# Altium PCB ADSTM32-PCB.PcbDoc
Units mm, origin at the board's own origin, x right, y up, seen from the top; angles counter-clockwise.
Board outline 49.53 x 28 mm, 2 copper layers (Top Layer, Bottom Layer), stack 1.67 mm thick; 30 components, 26 nets, 139 pads, 69 vias.
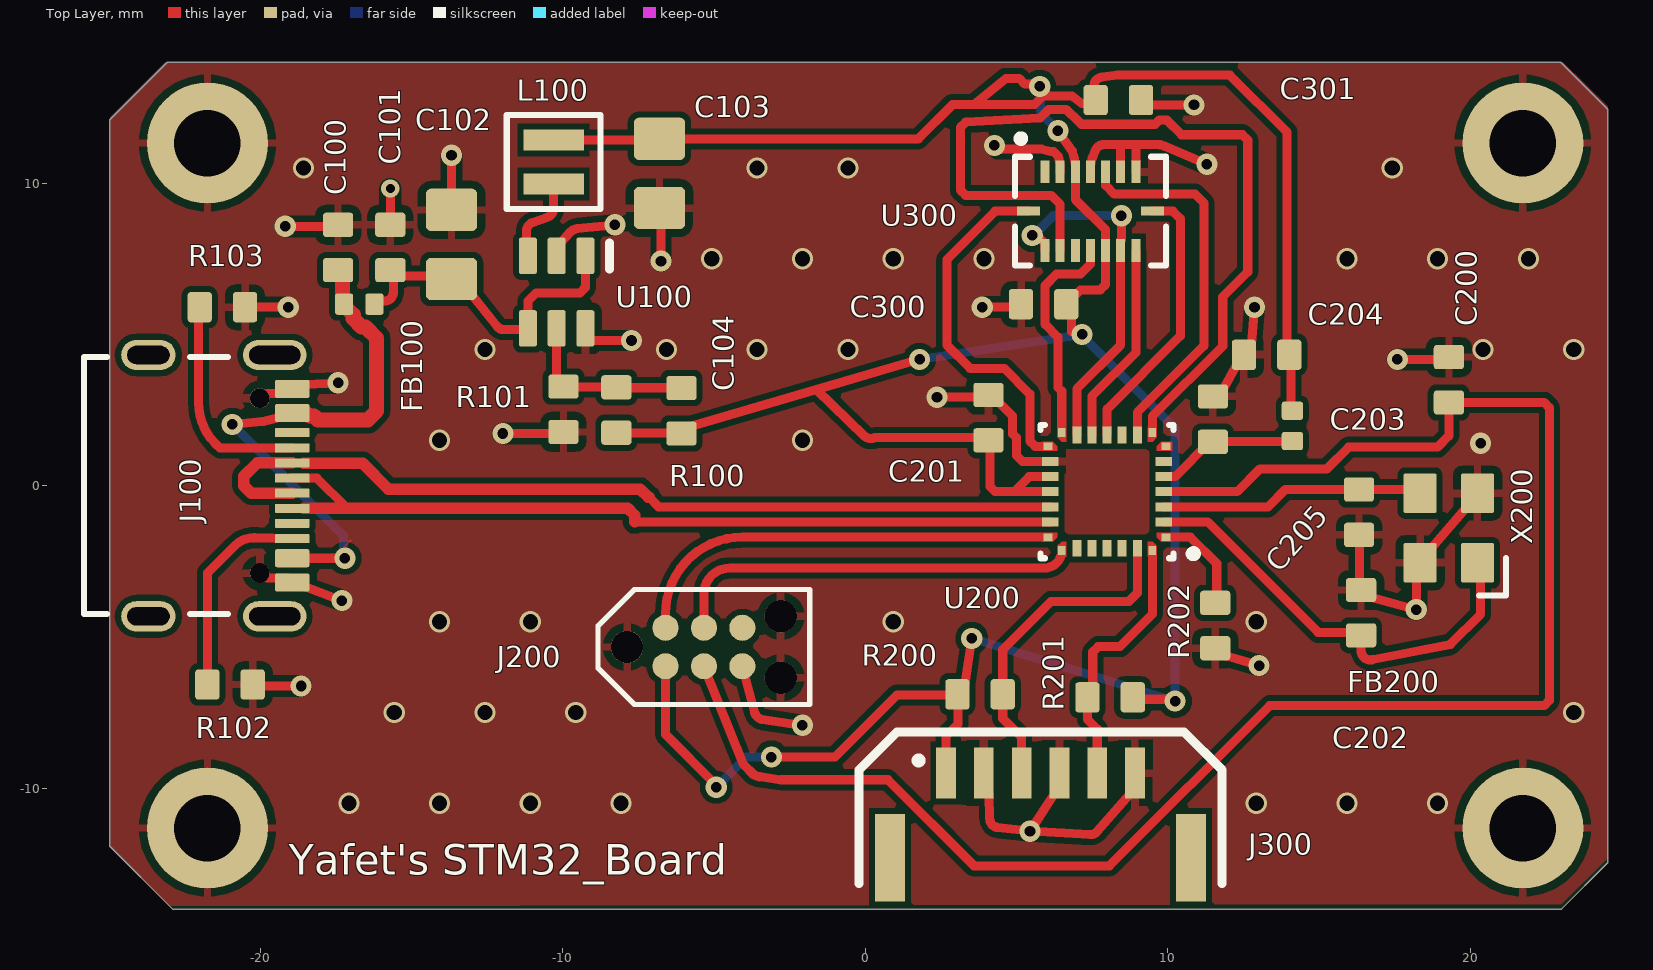
[diagram p0: Top Layer view]
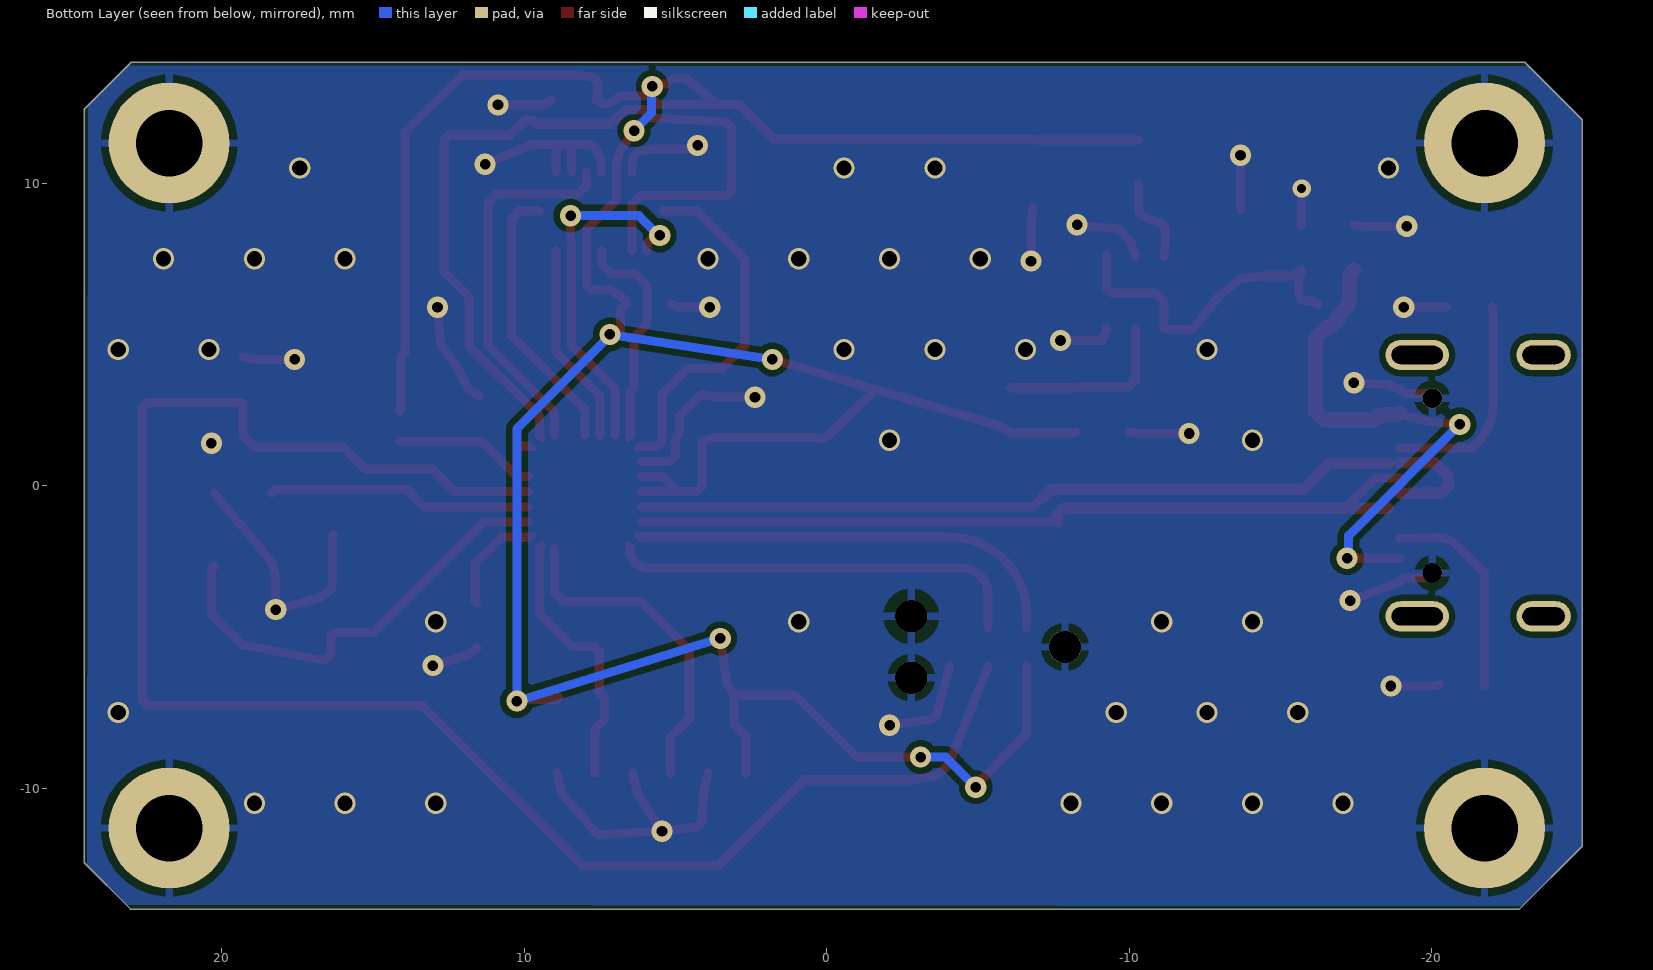
[diagram p1: Bottom Layer view, seen from below]
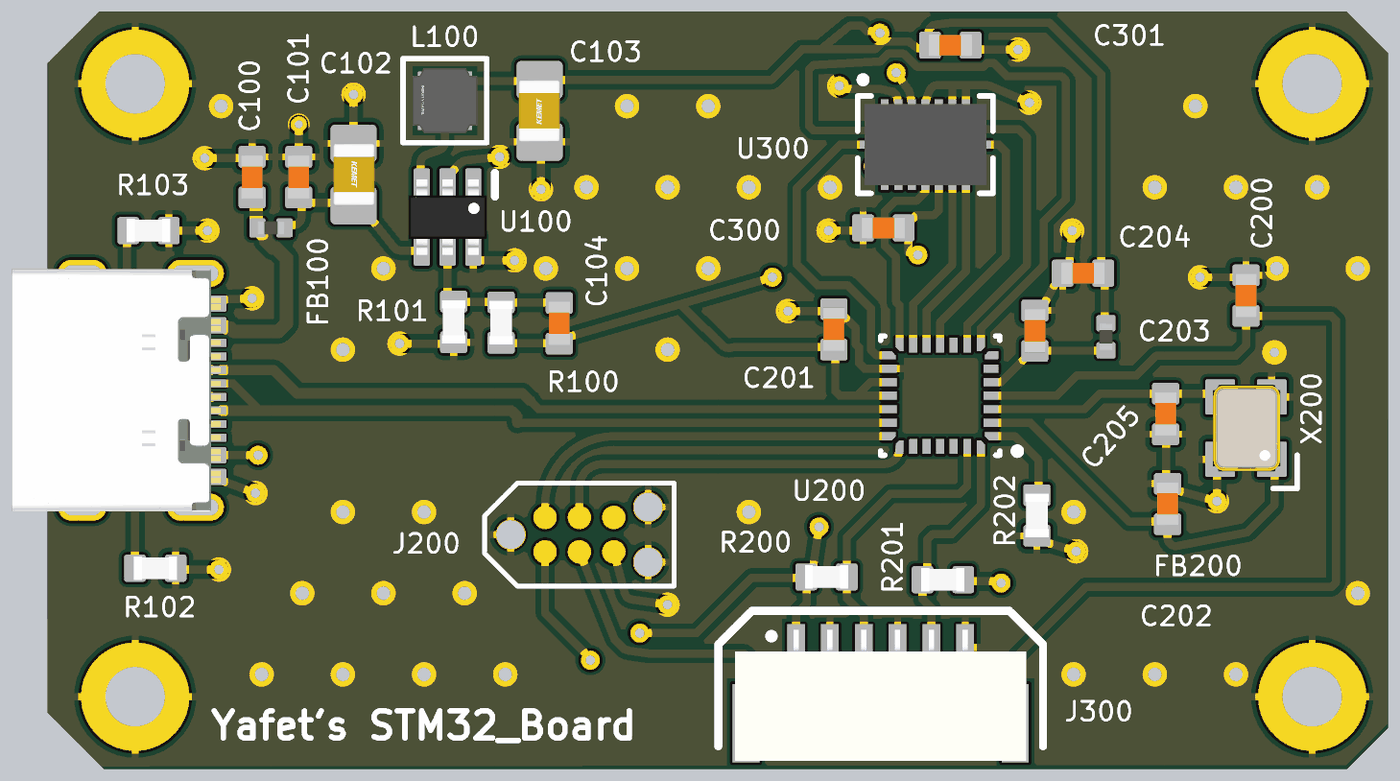
[diagram p2: 3D render of the assembled board from above, using the file's embedded part models]

## Layer stack, top to bottom
Top Solder: solder mask 0.0254, SM-001, Dk 3.5
Top Layer: signal copper 0.035
Dielectric 1: core 1.6, Core-043, Dk 4.6
Bottom Layer: signal copper 0.035
Bottom Solder: solder mask 0.0254, SM-001, Dk 3.5

## Board outline
-22.9,-14 -24.975,-11.925 -24.975,12.1 -23.075,14 23,14 24.555,12.445 24.555,-12.47 23.025,-14 22.357,-14

## Design rules (kind name [scope] priority, off if disabled: settings)
Clearance [All] p1: gap=0.2 ignorepadtopadclearanceinfootprint=FALSE except(0: Arc-Hole Track-Hole SMDPad-Hole THPad-Hole Via-Hole Fill-Hole Poly-Hole Region-Hole Text-Hole; 0.15: Arc-Arc Arc-Track Arc-SMDPad Track-Track Track-SMDPad SMDPad-SMDPad; 0.3: Arc-THPad Track-THPad SMDPad-THPad THPad-THPad)
DiffPairsRouting [All] p1: maxlimit=0.35 minlimit=0.15 mostfreqgap=0.254 toplayer_minwidth=0.3 toplayer_maxwidth=0.5 toplayer_prefwidth=0.381 bottomlayer_minwidth=0.3 bottomlayer_maxwidth=0.5 bottomlayer_prefwidth=0.381 maxuncoupledlength=12.7
PolygonConnect [All] p1: thpad.connectstyle=Relief thpad.reliefconductorwidth=0.254 thpad.reliefentries=4 thpad.polygonreliefangle="90 Angle" thpad.airgapwidth=0.254 smdpad.connectstyle=Relief smdpad.reliefconductorwidth=0.254 smdpad.reliefentries=4 smdpad.polygonreliefangle="90 Angle" smdpad.airgapwidth=0.254 via.connectstyle=Direct via.reliefconductorwidth=0.254 via.reliefentries=4 via.polygonreliefangle="90 Angle" via.airgapwidth=0.254
RoutingVias [All] p1: holewidth=0.3 width=0.6 viastyle="Through Hole" minholewidth=0.25 minwidth=0.6 maxholewidth=0.3 maxwidth=0.7
SolderMaskExpansion [All] p1: expansion=0.102 istentingtop=FALSE
SupplyNets "Schematic Supply Nets_4" [InNet('+VUSB')] p1: voltage=0.000
SupplyNets "Schematic Supply Nets_3" [InNet('GND')] p2: voltage=0.000
SupplyNets "Schematic Supply Nets_2" [InNet('+3V3A')] p3: voltage=0.000
SupplyNets "Schematic Supply Nets_1" [InNet('+5V')] p4: voltage=0.000
SupplyNets "Schematic Supply Nets" [InNet('+3V3')] p5: voltage=0.000
UnRoutedNet [All] p1: checkbadconnections=TRUE
Width [All] p1: maxlimit=1 minlimit=0.15 preferedwidth=0.3 minimp=50.000000 maximp=50.000000 favimp=50.000000
28 further rules are at their usual default settings.

## Classes and differential pairs
component class U_1_ADSTM32-Power: C100 C101 C102 C103 C104 FB100 J100 L100 R100 R101 R102 R103 U100
component class "[3] Peripheral": C300 C301 J300 U300
component class "[2] Microcontroller": C200 C201 C202 C203 C204 C205 FB200 J200 R200 R201 R202 U200 X200
differential pair USB_D: +USB_D_P -USB_D_N

## Components (designator, comment, footprint, x,y, rotation, side; value= is the part's Value field where it differs from the comment)
C100 "100n" CAP_0603 -17.425,7.875 r270 top
C101 "100n" CAP_0603 -15.7,7.875 r270 top
C102 "4u7" CAP_0805 -13.675,7.975 r270 top
C103 "4u7" CAP_0805 -6.8,10.325 r90 top
C104 "22p" CAP_0603 -6.075,2.475 r270 top
C200 "100n" CAP_0603 19.3,3.5 r270 top
C201 "100n" CAP_0603 4.075,2.25 r270 top
C202 "100n" CAP_0603 16.4,-4.2 r270 top
C203 "100n" CAP_0603 16.33,-0.875 r90 top
C204 "100n" CAP_0603 13.275,4.325 r0 top
C205 "100n" CAP_0603 11.5,2.2 r270 top
C300 "100n" CAP_0603 5.9,6 r0 top
C301 "100n" CAP_0603 8.375,12.75 r180 top
FB100 "120R" FB_0402 -16.725,6 r0 top
FB200 "120R" FB_0402 14.125,1.975 r270 top
J100 "USB4105-GF-A-060" USB4105-GF-A-060 -21.32,0 r270 top locked
J200 "TC2030-NL" TC2030-NL-FP -5.33,-5.335 r0 top
J300 "SM06B-GHS-TB" SM06B-GHS-TB 5.8,-10.9 r0 top
L100 "10u" FP-NRH2412-MFG -10.3,10.7 r90 top
R100 "887k" RES_0603 -8.225,2.5 r270 top
R101 "280k" RES_0603 -9.975,2.525 r90 top
R102 "5k1" RES_0603 -21,-6.575 r180 top
R103 "5k1" RES_0603 -21.25,5.9 r180 top
R200 "5k1" RES_0603 3.8,-6.9 r180 top
R201 "5k1" RES_0603 8.1,-7 r0 top
R202 "5k1" RES_0603 11.575,-4.625 r90 top
U100 "LTC3405ES6#TRMPBF" SOT-23-6 -10.2,6.4 r180 top
U200 "STM32F042G6U6" STM-UFQFPN28_V 8,-0.2 r180 top
U300 "BMI088" BMI088 7.45,9.075 r0 top
X200 "24MHz" XTAL_3225 19.3,-1.4 r90 top

## Footprints (in the part's own frame and the unit in brackets; to place one, negate y for a bottom-side part, rotate by r counter-clockwise, add the part's x,y. Pads: shape width x height; smd on the part's side, far side on the other; paste and mask are expansions set on the pad)
BMI088 [mm]
  rect 0.3x0.75 smd: 1(-1.5,1.3) 2(-1,1.3) 3(-0.5,1.3) 4(0,1.3) 5(0.5,1.3) 6(1,1.3) 7(1.5,1.3) 9(1.5,-1.3) 10(1,-1.3) 11(0.5,-1.3) 12(0,-1.3) 13(-0.5,-1.3) 14(-1,-1.3) 15(-1.5,-1.3)
  rect 0.75x0.3 smd: 8(2.05,0) 16(-2.05,0)
  silkscreen extent -2.5,-1.8 2.5,2.51, body extent -2.25,-1.5 2.25,1.5, height 1.01
CAP_0603 [mm]
  rrect25% 0.8x1 smd: 1(-0.75,0) 2(0.75,0)
  body extent -0.8,-0.4 0.8,0.4, height 0.51
CAP_0805 [mm]
  rrect25% 1.4x1.7 smd: 1(-1.143,0) 2(1.143,0)
  body extent -1.15,-0.76 1.15,0.79, height 1.01
FB_0402 [mm]
  rrect25% 0.6x0.7 smd: 1(-0.5,0) 2(0.5,0)
  body extent -0.5,-0.25 0.5,0.25, height 0.51
FP-NRH2412-MFG [mm]
  rect 0.7x2 smd paste+0 mask+0: 1(-0.725,0) 2(0.725,0)
  silkscreen extent -1.55,-1.55 1.55,1.55, body extent -1.35,-1.35 1.35,1.35, height 0.25
RES_0603 [mm]
  rrect25% 0.8x1 smd: 1(-0.75,0) 2(0.75,0)
  body extent -0.8,-0.43 0.8,0.43, height 0.52
SM06B-GHS-TB [mm]
  rect 0.65x1.7 smd: 1(-3.125,1.4) 2(-1.875,1.4) 3(-0.625,1.4) 4(0.625,1.4) 5(1.875,1.4) 6(3.125,1.4)
  rect 1x2.9 smd: ""(-4.975,-1.4) ""(4.975,-1.4)
  silkscreen extent -6,-2.25 6,2.75, body extent -5.38,-2.8 5.38,2.05, height 4.26
SOT-23-6 [mm]
  rrect25% 0.6x1.2 smd: 1(-0.95,-1.2) 2(0,-1.2) 3(0.95,-1.2) 4(0.95,1.2) 5(0,1.2) 6(-0.95,1.2)
  silkscreen extent -1.75,-1.63 -1.75,-0.76, body extent -1.45,-1.4 1.45,1.4, height 1.45
STM-UFQFPN28_V [mm] "QFN, 28-Leads, Body 4.1x4.1mm, Pitch 0.5mm"
  rect 0.3x0.25 smd: 1(-1.95,1.5) 7(-1.95,-1.5) 15(1.95,-1.5) 21(1.95,1.5)
  rect 0.55x0.3 smd: 2(-1.875,1) 3(-1.875,0.5) 4(-1.875,0) 5(-1.875,-0.5) 6(-1.875,-1) 16(1.875,-1) 17(1.875,-0.5) 18(1.875,0) 19(1.875,0.5) 20(1.875,1)
  rect 0.25x0.3 smd: 8(-1.5,-1.95) 14(1.5,-1.95) 22(1.5,1.95) 28(-1.5,1.95)
  rect 0.3x0.55 smd: 9(-1,-1.875) 10(-0.5,-1.875) 11(0,-1.875) 12(0.5,-1.875) 13(1,-1.875) 23(1,1.875) 24(0.5,1.875) 25(0,1.875) 26(-0.5,1.875) 27(-1,1.875)
  Top Layer region: 2.15,-1.35 1.65,-1.35 1.65,-1.505 1.795,-1.65 2.15,-1.65
  Top Layer region: -2.15,1.35 -1.65,1.35 -1.65,1.505 -1.795,1.65 -2.15,1.65
  Top Layer region: 1.35,-2.15 1.35,-1.65 1.505,-1.65 1.65,-1.795 1.65,-2.15
  Top Layer region: -1.35,-2.15 -1.35,-1.65 -1.505,-1.65 -1.65,-1.795 -1.65,-2.15
  Top Layer region: -2.15,-1.35 -1.65,-1.35 -1.65,-1.505 -1.795,-1.65 -2.15,-1.65
  Top Layer region: 2.15,1.35 1.65,1.35 1.65,1.505 1.795,1.65 2.15,1.65
  Top Layer region: 1.35,2.15 1.35,1.65 1.505,1.65 1.65,1.795 1.65,2.15
  Top Layer region: -1.35,2.15 -1.35,1.65 -1.505,1.65 -1.65,1.795 -1.65,2.15
  silkscreen extent -2.98,-2.2 2.2,2.2, body extent -2.05,-2.05 2.05,2.05, height 0.6
TC2030-NL-FP [mil]
  round 33.98 smd paste-16.99: 1(-50,-25) 2(-50,25) 3(0,-25) 4(0,25) 5(50,-25) 6(50,25)
  round 42.01 hole 42.01: MH(-100,0) MH(100,-40) MH(100,40)
  silkscreen extent -138,-75 138,75
USB4105-GF-A-060 [mm]
  rrect25% 0.6x1.15 smd mask+0.05: A1B12(-3.2,2.378) A4B9(-2.4,2.378) B1A12(3.2,2.378) B4A9(2.4,2.378)
  rrect25% 0.3x1.15 smd mask+0.05: A5(-1.25,2.378) A6(-0.25,2.378) A7(0.25,2.378) A8(1.25,2.378) B5(1.75,2.378) B6(0.75,2.378) B7(-0.75,2.378) B8(-1.75,2.378)
  round 0.65 hole 0.65 mask+0.05: MH(-2.89,1.303) MH(2.89,1.303)
  oval 1x2.1 hole 0.6 slot 1.7 at 90 deg: SH(-4.32,1.803) SH(4.32,1.803)
  oval 1x1.8 hole 0.6 slot 1.4 at 90 deg: SH(-4.32,-2.377) SH(4.32,-2.377)
  silkscreen extent -4.25,-4.5 4.25,0.25, body extent -4.47,-4.97 4.47,2.73, height 3.27
XTAL_3225 [mm]
  rrect10% 1.3x1.1 smd: 1(-1.15,-0.95) 2(1.15,-0.95) 3(1.15,0.95) 4(-1.15,0.95)
  silkscreen extent -2.23,-1.89 -1,-1, body extent -1.6,-1.28 1.6,1.22, height 0.61

## Part data
C100 C101 C104 C200 C201 C202 C203 C204 C205 C300 C301: library part CAP_0603, "Capacitor SMD 0603"
C102 C103: library part CAP_0805, "Capacitor SMD 0805"
FB100 FB200: library part FB_0402, "Ferrite Bead SMD 0402"
J100: "USB Connector Type C SMT 12 Pin", Manufacturer=GCT, Distributor Link=https://eu.mouser.com/ProductDetail/GCT/USB4105-GF-A-060?qs=QNEnbhJQKvY2mocwNJzgfA%3D%3D, Manufacturer Part Number=USB4105-GF-A-060
J200: "Tag-Connect No-Solder SWD Debug Connector (No Legs) DO NOT PLACE", Manufacturer=Tag-Connect, Manufacturer Part Number=TC2030-NL-FP
J300: "Header Connector 6 Position 1.25MM Pitch SMD Horizontal JST GH", Manufacturer=JST, Manufacturer Part Number=SM06B-GHS-TB
L100: library part CMP-14484-000582-1, "Shielded Wirewound Inductor 10uH 20% 0.51A 0.72Ω SMD", Case/Package=Nonstandard, Current Rating=450mA, DC Resistance (DCR)=600mR, Inductance=10uH, Max DC Current=810mA, Max Operating Temperature=120°C, Min Operating Temperature=-25°C, Package Quantity=2500, Self Resonant Frequency=29MHz, Test Frequency=100kHz, Tolerance=20%, Core Material=Ferrite, Halogen Free="Halogen Free", Height=1.2mm, Height - Seated (Max)=0.047inch, Length=0.095inch, Mount="Surface Mount", Packaging="Tape and Reel", RoHS Compliant=Yes, Saturation Current=810mA, Shielding=Shielded, Termination=SMD/SMT, Width=0.095inch
R100 R101 R102 R103 R200 R201 R202: library part RES_0603, "Resistor SMD 0603"
U100: "1.5MHz, 300mA /  Synchronous Step-Down /  Regulator in ThinSOT", Manufacturer="Analog Devices", Manufacturer Part Number=LTC3405ES6#TRMPBF
U200: library part CMP-0304-00112-2, "ARM Cortex-M0 32-bit MCU, 32 KB Flash, 6 KB Internal RAM, 24 I/Os, 28-Pin UFQFPN, -40 to 85 degC, Tray", I/Os (High Current)=24, Manufacturer=STMicroelectronics, Operating Frequency(F) (Processor speed) (MHz)=48, Package Description="28-Pin Ultra Thin Fine Pitch Quad Flat No-Lead, 4 x 4 x 0.6 mm Body, 0.5 mm Pitch", Package Reference=UFQFPN28, Supply Voltage(Vcc) min (V)=2, ComponentLink1Description="Manufacturer URL", ComponentLink1URL=http://www.st.com/, ComponentLink2Description=Datasheet, ComponentLink2URL=http://www.st.com/st-web-ui/static/active/en/resource/technical/document/datasheet/DM00105814.pdf, Core="ARM Cortex-M0", DatasheetVersion="Rev. 5", FLASH Size (Prog) (kB)=32, Internal RAM Size (kB)=6, Mounting Technology="Surface Mount", Packing=Tray, PartNumber=STM32F042G6U6
U300: "Inertial Measurement Unit IMU 6-Axis LGA", Manufacturer=Bosch, Manufacturer Part Number=BMI088
X200: library part TSX-3225_24.0000MF15X-AC, "Crystal SMD 24MHz 10PPM 7pF 3225", Manufacturer=Epson, Manufacturer Part Number="TSX-3225 24.0000MF15X-AC"

## Free pads (board coordinates)
  round 4 hole 2.2: MH(-21.745,-11.325) MH(-21.745,11.325) MH(21.745,-11.325) MH(21.745,11.325)

## Via types
v1: diameter 0.7, hole 0.35, Top Layer to Bottom Layer, 34 vias
v2: diameter 0.7, hole 0.5, Top Layer to Bottom Layer, 34 vias
v3: diameter 0.6, hole 0.3, Top Layer to Bottom Layer, 1 vias

## Nets (pads, with @x,y where several pads share a name; then routed paths per layer and width w, separated by ;. In a path a pad name is that pad's centre, name@x,y a point inside that pad or via, vN(x,y) a via of type N, cw(c..) or ccw(c..) an arc to the next point about the centre after c; other vN are vias at no path point)
+3V3: C103.2 C104.2 C201.2 C204.2 C300.2 C301.2 FB200.1 J200.1 J300.1 L100.2 R100.2 R200.2 R201.2 U200.17 U200.18 U300.3 U300.11 | length 116.2
  Top Layer w0.3: L100.2 -6.843,11.425 C103.2 1.757,11.468 2.889,12.6 3.595,12.6 ; R100.2 -8.212,1.737 -6.087,1.737 -6.084,1.739 -5.725,1.975 -1.611,3.178 ; J200.1 -6.6,-8.225 -4.925,-9.9 v1(-4.925,-9.975) ; v1(-3.1,-8.974) -0.999,-8.974 1.05,-6.925 R200.2@3.075,-6.925 ; -0.022,1.642 -1.611,3.178 ; -0.021,1.641 ccw(c0.187,1.858) 0.282,1.573 ccw(c0.187,1.858) 0.283,1.573 cw(c0.378,1.289) 0.378,1.589 3.725,1.589 4.073,1.492 4.125,1.477 4.125,-0.024 4.301,-0.2 4.925,-0.2 ; v1(1.8,4.175) -1.611,3.178 ; J300.1 2.675,-8.275 3.075,-7.875 R200.2@3.075,-6.925 ; v1(3.525,-5.05) 3.3,-6.55 3.079,-6.918 R200.2@3.075,-6.925 ; v1(5.775,13.2) 5.698,13.277 5.281,13.277 5.09,13.468 4.777,13.468 4.655,13.468 3.595,12.6 ; U200.18 4.925,-0.2 ; U200.17 5.425,0.3 4.925,-0.2 ; v1(6.373,11.734) 6.85,11.061 6.9,10.874 6.95,10.6 6.95,9.46 7.95,8.46 U300.11 7.95,6.651 7.774,6.475 7.125,6.475 7,6.35 6.9,6.35 C300.2@6.65,6.1 ; C300.2 6.826,5.824 6.826,5.1 v1(7.175,5) ; R201.2 8.912,-7.063 10.188,-7.063 v1(10.25,-7.125) ; FB200.1 14.075,2.525 14.075,4.275 C204.2 13.95,4.4 13.95,11.683 12.06,13.573 8.348,13.573 7.828,13.511 ccw(c7.864,13.213) 7.564,13.213 7.564,13.1 C301.2 7.375,12.637 7.164,12.637 6.834,12.887 5.881,12.887 5.594,12.6 3.595,12.6
  Bottom Layer w0.3: v1(-4.925,-9.975) -3.924,-8.974 v1(-3.1,-8.974) ; v1(1.8,4.175) v1(7.175,5) ; v1(3.525,-5.05) v1(10.25,-7.125) 10.25,1.875 v1@7.275,4.85 ; v1(5.775,13.2) 5.803,13.172 5.803,12.314 6.373,11.744 v1(6.373,11.734)
+3V3A: C205.2 FB200.2 U200.5 | length 4.7
  Top Layer w0.3: U200.5 10.25,0.3 11.4,1.45 C205.2 11.512,1.462 14.113,1.462 FB200.2
+5V: C101.2 C102.2 FB100.2 U100.1 U100.4 | length 10.9
  Top Layer w0.3: FB100.2 -16.075,6.1 -15.897,6.1 ccw(c-15.897,6.4) -15.597,6.4 -15.597,6.875 C101.2 -15.35,6.93 -14.35,6.93 C102.2 -13,6.307 -12.171,5.271 -12.171,5.269 ccw(c-11.937,5.458) -11.937,5.158 -11.3,5.158 U100.4 -11.15,6.1 -10.875,6.375 -9.426,6.375 -9.25,6.551 U100.1
+VUSB: C100.2 FB100.1 J100.A4B9 J100.B4A9 | length 18
  Top Layer w0.3: v1(-20.925,2.025) -19.944,2.118 ccw(c-20.017,2.89) -19.835,2.137 -19.367,2.25 J100.A4B9 ; J100.B4A9 -18.517,-2.4 v1(-17.2,-2.4)
  Top Layer w0.5: J100.A4B9 -18.892,2.35 -18.415,2.35 -18.365,2.3 -18.224,2.3 -18.099,2.175 -16.443,2.175 -16.15,2.468 -16.15,4.875 -16.525,5.25 -16.647,5.25 -16.925,5.528 -16.925,5.65 -17.225,5.95 FB100.1 -17.275,6.1 -17.275,6.975 C100.2
  Bottom Layer w0.3: v1(-20.925,2.025) -17.25,-1.65 -17.25,-2.35 v1(-17.2,-2.4)
BOOT0: R202.2 U200.1 | length 3.4
  Top Layer w0.3: U200.1 10.75,-1.7 11.625,-2.575 11.625,-3.825 R202.2
BUCK_SW: L100.1 U100.3 | length 2.9
  Top Layer w0.3: U100.3 -11.2,8.05 -11.2,8.414 cw(c-10.9,8.414) -11.002,8.697 -10.498,8.878 ccw(c-10.6,9.161) -10.3,9.161 L100.1
BUCK_VFB: C104.1 R100.1 R101.2 U100.5 | length 5.9
  Top Layer w0.3: U100.5 -10.2,4.1 -10.2,3.5 R101.2 -9.962,3.263 -8.237,3.263 R100.1 -8.212,3.237 -6.087,3.237 C104.1
GND: C100.1 C101.1 C102.1 C103.1 C200.1 C201.1 C202.1 C203.1 C204.1 C205.1 C300.1 C301.1 J100.A1B12 J100.B1A12 J100.MH J200.5 J200.MH J300.2 J300.4 J300.6 pad.MH R101.1 R102.1 R103.1 R202.1 U100.2 U100.6 U200.16 U300.2 U300.4 U300.6 U300.7 X200.2 X200.4 | length 68
  Top Layer w0.3: pad.MH@-21.745,-11.325 pad.MH@-21.395,-10.975 ; R103.1 v1(-19.075,5.9) ; R102.1 -20,-6.625 v1(-18.65,-6.625) ; J100.MH@-20.017,-2.89 -19.923,-2.89 -19.763,-3.05 -19.092,-3.05 J100.B1A12 -18.517,-3.35 v1(-17.3,-3.8) ; J100.MH@-20.017,2.89 -19.923,2.89 -19.763,3.05 -19.092,3.05 J100.A1B12 -18.517,3.35 v1(-17.425,3.4) ; v1(-19.175,8.575) -17.775,8.575 C100.1 ; C101.1 v3(-15.7,9.825) ; C102.1 v1(-13.675,10.925) ; v1(-11.975,1.725) -10.325,1.725 R101.1 ; U100.2 -10.05,8.05 -9.752,8.377 cw(c-9.475,8.125) -9.513,8.498 v1(-8.275,8.625) ; U100.6 -9.1,4.8 v1(-7.725,4.8) ; C103.1 -6.75,8.657 v1(-6.75,7.425) ; J200.5 -3.651,-7.509 ; -3.65,-7.51 ccw(c-3.361,-7.432) -3.406,-7.729 v1(-2.075,-7.925) ; v1(2.375,2.925) 3.725,2.925 C201.1 ; v1(3.875,5.9) 4.9,5.9 C300.1 ; J300.2 4.1,-10.2 4.119,-11.013 ccw(c4.419,-11.006) 4.385,-11.304 v1(5.45,-11.425) ; C201.1@4.175,3 4.875,2.3 4.875,1.714 5,1.589 5,1.001 5.201,0.8 U200.16 ; v1(4.275,11.25) 4.4,11.125 5.83,11.125 6.138,11.051 6.224,11.05 6.4,10.874 6.45,10.6 U300.2 ; J300.4 6.25,-10.2 v1(5.45,-11.425) ; U300.4 7.45,10.6 7.51,10.827 cw(c7.8,10.75) 7.522,10.862 7.612,11.087 cw(c7.89,10.975) 7.89,11.275 8.45,11.275 ; U300.6 8.45,10.6 8.45,11.275 ; J300.6 8.75,-10.2 7.672,-11.439 cw(c7.445,-11.242) 7.429,-11.541 v1(5.45,-11.425) ; U300.7 8.95,11.275 ; C301.1 9.375,12.588 v1(10.875,12.588) v1@10.613,12.588 ; 9.888,11.229 9.796,11.26 ccw(c9.701,10.975) 9.701,11.275 8.95,11.275 ; 9.889,11.229 cw(c9.793,10.944) 9.911,11.22 v1(11.3,10.625) ; C205.1 11.85,3.2 12.275,3.975 C204.1 12.775,4.675 v1(12.875,5.9) ; R202.1 11.925,-5.625 v1(13.025,-5.95) ; C203.1 16.34,-1.875 16.34,-3.2 C202.1 16.75,-3.7 v1(18.225,-4.1) 18.225,-3.05 X200.4 18.75,-2.05 19.85,-0.75 X200.2 ; v1(17.6,4.175) 18.95,4.175 C200.1 ; 8.45,11.275 8.95,11.275
  other v1: 20.35,1.4
  other v2: -17.07,-10.5 -14.07,-10.5 -11.07,-10.5 -8.07,-10.5 12.93,-10.5 15.93,-10.5 18.93,-10.5 -15.57,-7.5 -12.57,-7.5 -9.57,-7.5 23.43,-7.5 -14.07,-4.5 -11.07,-4.5 0.93,-4.5 12.93,-4.5 -14.07,1.5 -2.07,1.5 -12.57,4.5 -6.57,4.5 -3.57,4.5 -0.57,4.5 20.43,4.5 23.43,4.5 -5.07,7.5 -2.07,7.5 0.93,7.5 3.93,7.5 15.93,7.5 18.93,7.5 21.93,7.5 -18.57,10.5 -3.57,10.5 -0.57,10.5 17.43,10.5
"I2C SCL": J300.3 R200.1 U200.27 | length 11
  Top Layer w0.3: J300.3 5.175,-8.325 4.55,-7.7 R200.1 4.55,-5.425 6.15,-3.825 8.724,-3.825 9,-3.549 U200.27
"I2C SDA": J300.5 R201.1 U200.28 | length 8.8
  Top Layer w0.3: J300.5 7.675,-8.05 7.35,-7.725 R201.1 7.525,-6.825 7.525,-5.501 7.701,-5.325 8.425,-5.325 9.5,-4.25 U200.28
"IMU MISO": U200.13 U300.10 U300.15 | length 11.8
  Top Layer w0.3: v1(5.525,8.275) 5.602,8.198 5.752,8.198 5.95,8 U300.15 ; U200.13 7,3.2 8.45,4.65 U300.10 8.45,8.1 8.475,8.125 v1(8.475,8.925)
  Bottom Layer w0.3: v1(5.525,8.275) 5.569,8.275 6.219,8.925 v1(8.475,8.925)
"IMU MOSI": U200.12 U300.9 | length 6.7
  Top Layer w0.3: U200.12 7.5,2.95 8.95,4.4 U300.9
"IMU NCS ACC": U200.8 U300.14 | length 28.3
  Top Layer w0.3: U300.14 6.45,9.299 6.15,9.6 3.326,9.6 3.15,9.775 3.15,11.842 3.326,12.018 5.78,12.15 6.068,12.437 6.648,12.437 7.066,12.044 7.094,12.016 7.159,11.95 9.591,11.95 9.731,12.09 9.98,12.09 10.467,11.603 12.474,11.603 12.65,11.427 12.65,7.068 11.825,6.243 11.825,4.614 9.5,2.289 U200.8
"IMU NCS GYR": U200.9 U300.5 | length 12.5
  Top Layer w0.3: U300.5 7.95,9.926 8.238,9.638 10.912,9.638 11.2,9.35 11.2,4.625 9,2.425 U200.9
"IMU SCK": U200.11 U300.8 | length 9.2
  Top Layer w0.3: U200.11 8,2.525 10.425,4.95 10.425,8.825 10.175,9.075 U300.8
NetU200_14: U200.14 U300.12 | length 7.3
  Top Layer w0.3: U200.14 6.5,3.125 6.375,3.25 6.375,4.911 5.95,5.336 5.95,6.618 6.332,7 7.125,7 7.45,7.326 U300.12
NetU200_15: U200.15 U300.16 | length 11.8
  Top Layer w0.3: U300.16 4.3,9.075 2.7,7.475 2.7,4.65 3.475,3.875 4.6,3.875 5.45,3.025 5.45,1.476 5.626,1.3 U200.15
NRST: C200.2 J200.3 U200.4 | length 58.1
  Top Layer w0.3: J200.3 -4.025,-9.215 -3.674,-9.566 ccw(c-2.79,-7.185) -3.496,-9.625 -2.79,-9.725 0.75,-9.725 3.6,-12.575 8.075,-12.575 13.375,-7.275 22.449,-7.275 22.625,-7.099 22.625,2.574 22.449,2.75 C200.2 19.3,1.65 18.925,1.275 15.988,1.275 15.262,0.55 13.05,0.55 12.3,-0.2 U200.4
OSC_IN: C202.2 U200.2 X200.1 | length 14.8
  Top Layer w0.3: U200.2 11.325,-1.2 14.975,-4.85 16.3,-4.85 C202.2 16.4,-5.461 ccw(c16.7,-5.461) 16.756,-5.756 19.35,-5.25 20.35,-4.25 20.35,-2.75 X200.1@20.25,-2.65
OSC_OUT: C203.2 U200.3 X200.3 | length 8.8
  Top Layer w0.3: U200.3 13.325,-0.7 13.9,-0.125 C203.2 18.225,-0.125 X200.3
SWCLK: J200.4 U200.22 | length 13.8
  Top Layer w0.3: J200.4 -5.33,-3.58 cw(c-4.475,-3.58) -4.475,-2.725 5.925,-2.725 ccw(c5.925,-2.15) U200.22
SWDIO: J200.2 U200.21 | length 14.6
  Top Layer w0.3: J200.2 -6.6,-4.24 cw(c-4.06,-4.24) -4.06,-1.7 U200.21
USB_CC1: J100.A5 R103.2 | length 7.3
  Top Layer w0.3: -22.043,2.75 ccw(c-20.109,2.75) -21.329,1.25 -21.217,1.25 -19.367,1.25 J100.A5 ; -22.043,2.752 -22.043,5.55 R103.2
USB_CC2: J100.B5 R102.2 | length 6.9
  Top Layer w0.3: R102.2 -21.75,-2.892 -20.833,-1.974 cw(c-20.212,-2.616) -20.193,-1.723 J100.B5
USB_D_N: J100.A7 J100.B7 U200.19 | length 29.1
  Top Layer w0.3: -7.145,-0.387 -6.831,-0.7 U200.19
  Top Layer w0.381: J100.A7 -20.3,-0.25 -20.542,-0.008 -20.542,0.308 -20.1,0.75 J100.B7 ; J100.B7@-18.558,0.74 -16.615,0.74 -15.76,-0.115 -7.435,-0.115 -7.163,-0.387 -7.145,-0.387
USB_D_P: J100.A6 J100.B6 U200.20 | length 27.2
  Top Layer w0.3: J100.A6 -18.125,0.25 -17.125,-0.75 ; -7.625,-1.2 U200.20
  Top Layer w0.381: J100.B6@-18.558,-0.75 -17.125,-0.75 -7.848,-0.75 -7.625,-0.973 -7.625,-1.2
pads on no net: J100.A8 J100.B8 J100.SH J200.6 J300. U200.6 U200.7 U200.10 U200.23 U200.24 U200.25 U200.26 U300.1 U300.13

## Polygon pours and split planes (outlines as drawn)
GND on Top Layer "GND_L01_P010" (solid, pour order 10): -24.953,12.175 -23.153,13.975 23.078,13.975 24.552,12.542 24.526,-12.346 23.022,-13.849 -22.993,-13.9 -24.979,-11.94
no net on Top Layer "NONET_L01_P002" (solid, pour order 2): -17.2,-2 -17,-1.8
GND on Bottom Layer "GND_L02_P009" (solid, pour order 9): -24.95,12.125 -23.2,13.875 23.1,13.9 24.425,12.575 24.451,-12.572 23.138,-13.849 -22.999,-13.901 -24.975,-11.925

## Silkscreen, mask and mechanical layers (free items; w line width, h text height)
Top Overlay:
  text "Yafet's STM32_Board" at -19.05,-12.858 h1